# Altium PCB DiPHO_Diode_AFE.PcbDoc
Units mm, origin at the board's own origin, x right, y up, seen from the top; angles counter-clockwise.
Board outline 25 x 25 mm, 2 copper layers (Top Layer, Bottom Layer), stack 1.571 mm thick; 5 components, 0 nets, 89 pads, 0 vias.
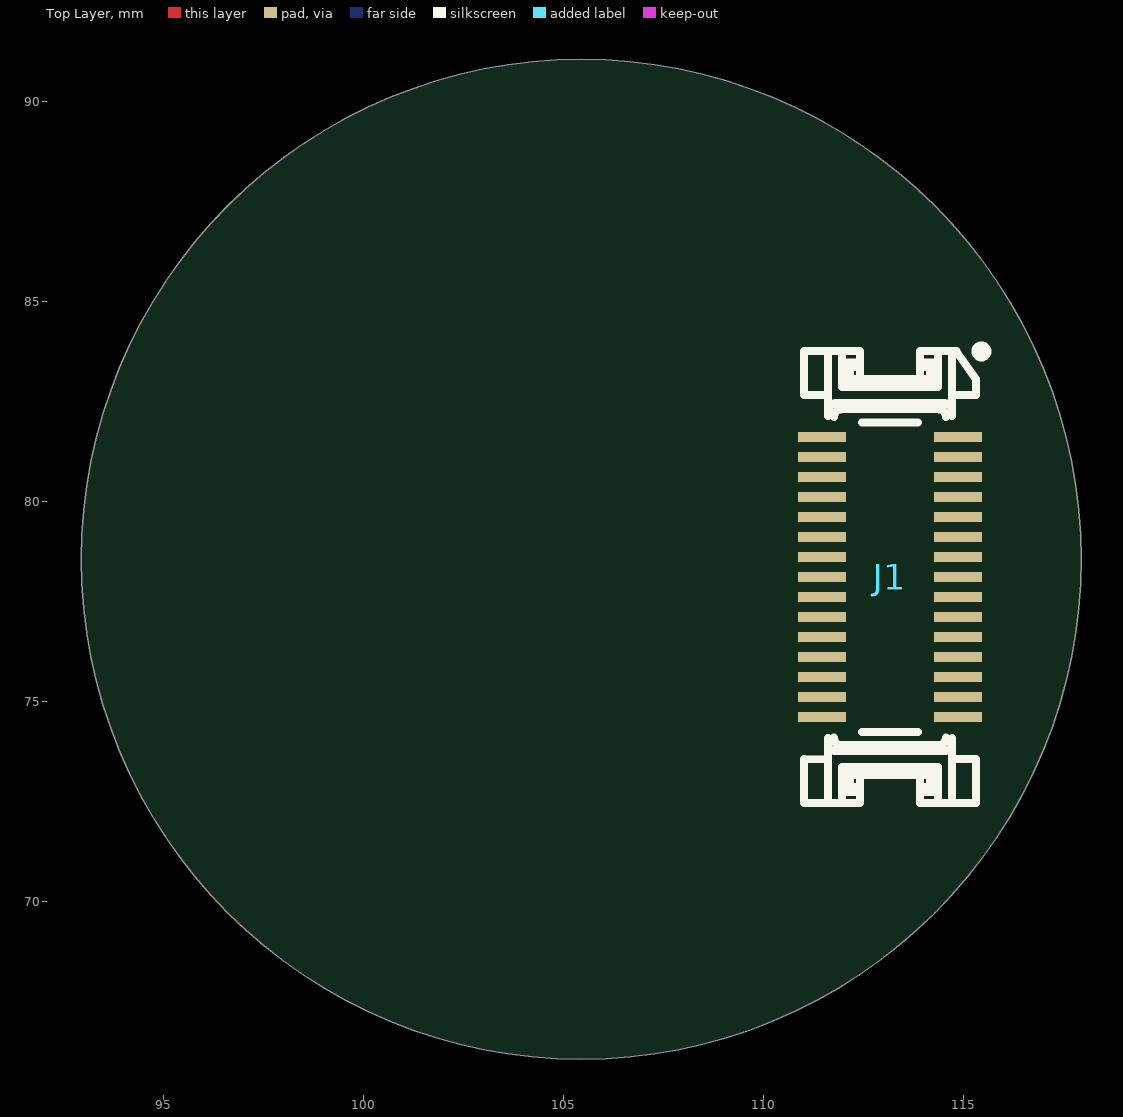
[diagram p0: Top Layer view]
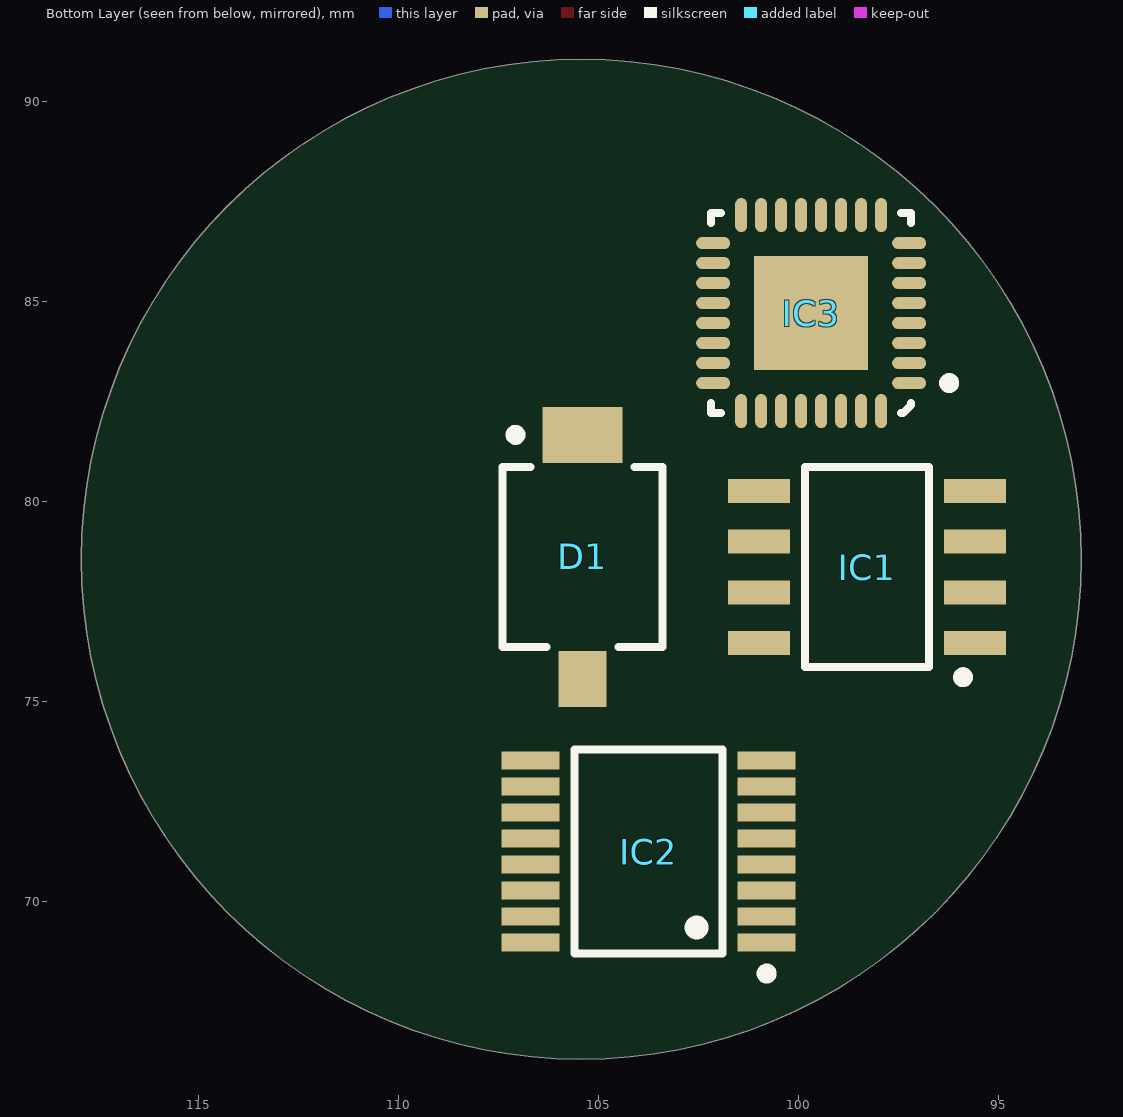
[diagram p1: Bottom Layer view, seen from below]

## Layer stack, top to bottom
Top Solder: solder mask 0.0102, Solder Resist, Dk 3.5
Top Layer: signal copper 0.0356
Dielectric 1: dielectric 1.5, FR-4, Dk 4.8
Bottom Layer: signal copper 0.0356
Bottom Solder: solder mask 0.0102, Solder Resist, Dk 3.5

## Board outline
92.941,78.552 ccw(c105.441,78.552) 105.441,66.052 ccw(c105.441,78.552) 117.941,78.552 ccw(c105.441,78.552) 105.441,91.052 ccw(c105.441,78.552)

## Design rules (kind name [scope] priority, off if disabled: settings)
Clearance [All] p1: gap=0.254 ignorepadtopadclearanceinfootprint=FALSE except(0: Arc-Hole Track-Hole SMDPad-Hole THPad-Hole Via-Hole Fill-Hole Poly-Hole Region-Hole Text-Hole)
PolygonConnect [All] p1: connectstyle=Relief reliefconductorwidth=0.254 reliefentries=4 polygonreliefangle="90 Angle" airgapwidth=0.254
RoomDefinition DiPHO_Diode_AFE [InComponentClass('DiPHO_Diode_AFE')] p1: confinementstyle=ConfineIn formatcopy=TRUE lockcomponents=FALSE outline 118.999,67.564 147.701,67.564 147.701,82.296 118.999,82.296
RoutingVias [All] p1: holewidth=0.711 width=1.27 viastyle="Through Hole" minholewidth=0.711 minwidth=1.27 maxholewidth=0.711 maxwidth=1.27
SolderMaskExpansion [All] p1: expansion=0.102 istentingtop=FALSE
Width [All] p1: maxlimit=0.254 minlimit=0.254 preferedwidth=0.254
30 further rules are at their usual default settings.

## Components (designator, comment, footprint, x,y, rotation, side; value= is the part's Value field where it differs from the comment)
D1 "BPW34FS" OSRAM_BPW34FS 105.41,78.613 r270 bottom
IC1 "TL072CD" SOIC127P600X175-8N 98.298,78.359 r0 bottom
IC2 "ADG5408BRUZ" SOP65P640X120-16N 103.759,71.247 r0 bottom
IC3 "ADL5304ACPZ" QFN50P500X500X80-33N-S285 99.695,84.709 r0 bottom
J1 "SlimStack™" MOLEX_53748-0308 113.157,78.105 r270 top

## Footprints (in the part's own frame and the unit in brackets; to place one, negate y for a bottom-side part, rotate by r counter-clockwise, add the part's x,y. Pads: shape width x height; smd on the part's side, far side on the other; paste and mask are expansions set on the pad)
MOLEX_53748-0308 [mm] "0.50mm Pitch SlimStack Dual Row 30 Circuits Surface Mount Vertical Plug (3.00mm Stacking Heights)"
  rect 0.25x1.2 smd: 1(-3.5,1.7) 2(-3.5,-1.7) 3(-3,1.7) 4(-3,-1.7) 5(-2.5,1.7) 6(-2.5,-1.7) 7(-2,1.7) 8(-2,-1.7) 9(-1.5,1.7) 10(-1.5,-1.7) 11(-1,1.7) 12(-1,-1.7) 13(-0.5,1.7) 14(-0.5,-1.7) 15(0,1.7) 16(0,-1.7) 17(0.5,1.7) 18(0.5,-1.7) 19(1,1.7) 20(1,-1.7) 21(1.5,1.7) 22(1.5,-1.7) 23(2,1.7) 24(2,-1.7) 25(2.5,1.7) 26(2.5,-1.7) 27(3,1.7) 28(3,-1.7) 29(3.5,1.7) 30(3.5,-1.7)
  silkscreen extent -5.77,-2.15 5.65,2.41, body extent -5.65,-2.15 5.65,2.15, height 2.42
OSRAM_BPW34FS [mm] "SMT Silicon PIN Photodiode, Photosensitive Area 2.65 x 2.65 mm, with Daylight Filter"
  rect 1.4x2 smd: 1(-3.05,0)
  rect 1.4x1.2 smd: 2(3.05,0)
  silkscreen extent -3.17,-2 2.25,2, body extent -3.35,-2 3.35,2, height 1.2
QFN50P500X500X80-33N-S285 [mm] "QFN, 0.50mm Pitch, Square; 8 Pin X 8 Pin, 5mm X 5mm X 0.80mm H body (w/thermal tab 2.85 X 2.85mm),  IPC Medium Density"
  oval 0.85x0.3 smd: 1(-2.45,1.75) 2(-2.45,1.25) 3(-2.45,0.75) 4(-2.45,0.25) 5(-2.45,-0.25) 6(-2.45,-0.75) 7(-2.45,-1.25) 8(-2.45,-1.75) 17(2.45,-1.75) 18(2.45,-1.25) 19(2.45,-0.75) 20(2.45,-0.25) 21(2.45,0.25) 22(2.45,0.75) 23(2.45,1.25) 24(2.45,1.75)
  oval 0.3x0.85 smd: 9(-1.75,-2.45) 10(-1.25,-2.45) 11(-0.75,-2.45) 12(-0.25,-2.45) 13(0.25,-2.45) 14(0.75,-2.45) 15(1.25,-2.45) 16(1.75,-2.45) 25(1.75,2.45) 26(1.25,2.45) 27(0.75,2.45) 28(0.25,2.45) 29(-0.25,2.45) 30(-0.75,2.45) 31(-1.25,2.45) 32(-1.75,2.45)
  rect 2.85x2.85 smd: 33(0,0)
  silkscreen extent -3.57,-2.5 2.5,2.5, body extent -2.5,-2.5 2.5,2.5, height 0.8
SOIC127P600X175-8N [mm] "SOIC 8, Pitch 1.27mm - Body 4x5mm, IPC Medium Density"
  rect 1.55x0.6 smd: 1(-2.7,1.905) 2(-2.7,0.635) 3(-2.7,-0.635) 4(-2.7,-1.905) 5(2.7,-1.905) 6(2.7,-0.635) 7(2.7,0.635) 8(2.7,1.905)
  silkscreen extent -2.52,-2.5 1.55,2.88, body extent -3.1,-2.5 3.1,2.5, height 1.75
SOP65P640X120-16N [mm] "SOP, 0.65mm pitch; 16 pin, 4.40mm W X 5.00mm L X 1.20mm H body IPC Medium Density"
  rect 1.45x0.45 smd: 1(-2.95,2.275) 2(-2.95,1.625) 3(-2.95,0.975) 4(-2.95,0.325) 5(-2.95,-0.325) 6(-2.95,-0.975) 7(-2.95,-1.625) 8(-2.95,-2.275) 9(2.95,-2.275) 10(2.95,-1.625) 11(2.95,-0.975) 12(2.95,-0.325) 13(2.95,0.325) 14(2.95,0.975) 15(2.95,1.625) 16(2.95,2.275)
  silkscreen extent -3.07,-2.55 1.85,3.17, body extent -3.12,-2.55 3.12,2.55, height 1.2

## Part data
D1: "Photodiode", Manufacturer=OSRAM, Author="CERN DEM JLC", Bonding=No, Component Type=Standard, ComponentHeight=1.2mm, CreateDate=21.09.2011, Device=BPW34FS, HelpURL=\\cern.ch\dfs\Applications\Altium\Datasheets\BPW34FS.pdf, LatestRevisionDate=21.09.2011, Manufacturer Part Number=BPW34FS, Mounted=Yes, PackageDescription="SMT Silicon PIN Photodiode, Photosensitive Area 2.65 x 2.65 mm, with Daylight Filter", Part Description="SMT Silicon PIN Photodiode, Photosensitive Area 2.65 x 2.65 mm, with Daylight Filter", Part Number=BPW34FS, Pin Count=2, PressFit=No, Sense=No, SMD=Yes, Socket=No
IC1: "Dual Operational Amplifier", Case=SOIC8, Manufacturer="TEXAS INSTRUMENTS", Author="CERN DEM JMW", Bonding=No, Component Type=Standard, ComponentHeight=1.75mm, CreateDate=07.05.2008, Device=TL072CD, HelpURL=\\cern.ch\dfs\Applications\Altium\Datasheets\TL072CD.pdf, LatestRevisionDate=07.05.2008, Manufacturer Part Number=TL072CD, Mounted=Yes, PackageDescription="SOIC 8, Pitch 1.27mm - Body 4x5mm, IPC Medium Density", Part Description="Dual Low-Noise JFET-Input Operational Amplifier", Part Number=TL072CD, Pin Count=8, PressFit=No, Sense=No, SMD=Yes, Socket=No
IC2: "High Voltage Latch-Up Proof, 8-Channel Multiplexer", Case=TSSOP16, Manufacturer="ANALOG DEVICES", Author="CERN DEM JLC", Bonding=No, Component Type=Standard, ComponentHeight=1.2mm, CreateDate=18.12.2013, Device=ADG5408BRUZ, HelpURL=\\cern.ch\dfs\Applications\Altium\Datasheets\ADG5408BRUZ.pdf, LatestRevisionDate=18.12.2013, Manufacturer Part Number=ADG5408BRUZ, Mounted=Yes, PackageDescription="SOP, 0.65mm Pitch; 16 Pin, 4.40mm W X 5.00mm L X 1.20mm H body, IPC Medium Density", Part Description="High Voltage Latch-Up Proof, 8-Channel Multiplexer", Part Number=ADG5408BRUZ, Pin Count=16, PressFit=No, Sense=No, SMD=Yes, Socket=No
IC3: "High Speed, 200 dB Range, Logarithmic Converter", Case=QFN32, Manufacturer="ANALOG DEVICES", Author="CERN DEM BC", Bonding=No, Component Type=Standard, ComponentHeight=0.8mm, CreateDate=09.02.2021, Device=ADL5304ACPZ, HelpURL=\\cern.ch\dfs\Applications\Altium\Datasheets\ADL5304ACPZ.pdf, LatestRevisionDate=09.02.2021, Manufacturer Part Number=ADL5304ACPZ, Mounted=Yes, PackageDescription="QFN, 0.50mm Pitch, Square; 32 Pin, 5.00mm L X 5.00mm W X 0.80mm H body (w/Thermal Tab 2.85 X 2.85mm), IPC Medium Density", Part Description="High Speed, 200 dB Range, Logarithmic Converter", Part Number=ADL5304ACPZ, Pin Count=33, PressFit=No, Sense=No, SMD=Yes, Socket=No
J1: library part MOLEX_53748-0308, "Connector 30 Male", Manufacturer=MOLEX, Manufacturer Part Number=53748-0308, Author="CERN DEM JLC", Component Type=Standard, ComponentHeight=2.4mm, CreateDate=28.08.2012, Family=SlimStack™, HelpURL=\\cern.ch\dfs\Applications\Altium\Datasheets\MOLEX_53748-0308.pdf, LatestRevisionDate=28.08.2012, Mounted=Yes, Part Description="0.50mm Pitch SlimStack™ Dual Row 30 Circuits Surface Mount Vertical Plug (3.00 Stacking Heights)", Part Number=MOLEX_53748-0308, Pin Count=30, PressFit=No, Sense=No, SMD=Yes, Socket=No, Status=None

## Nets (pads, with @x,y where several pads share a name; then routed paths per layer and width w, separated by ;. In a path a pad name is that pad's centre, name@x,y a point inside that pad or via, vN(x,y) a via of type N, cw(c..) or ccw(c..) an arc to the next point about the centre after c; other vN are vias at no path point)
pads on no net: D1.1 D1.2 IC1.1 IC1.2 IC1.3 IC1.4 IC1.5 IC1.6 IC1.7 IC1.8 IC2.1 IC2.2 IC2.3 IC2.4 IC2.5 IC2.6 IC2.7 IC2.8 IC2.9 IC2.10 IC2.11 IC2.12 IC2.13 IC2.14 IC2.15 IC2.16 IC3.1 IC3.2 IC3.3 IC3.4 IC3.5 IC3.6 IC3.7 IC3.8 IC3.9 IC3.10 IC3.11 IC3.12 IC3.13 IC3.14 IC3.15 IC3.16 IC3.17 IC3.18 IC3.19 IC3.20 IC3.21 IC3.22 IC3.23 IC3.24 IC3.25 IC3.26 IC3.27 IC3.28 IC3.29 IC3.30 IC3.31 IC3.32 IC3.33 J1.1 J1.2 J1.3 J1.4 J1.5 J1.6 J1.7 J1.8 J1.9 J1.10 J1.11 J1.12 J1.13 J1.14 J1.15 J1.16 J1.17 J1.18 J1.19 J1.20 J1.21 J1.22 J1.23 J1.24 J1.25 J1.26 J1.27 J1.28 J1.29 J1.30

## Silkscreen, mask and mechanical layers (free items; w line width, h text height)
Mechanical 1:
  circle w0.254: c105.314,78.679 r12.5
  circle w0.254: c105.441,78.552 r12.5